# EAGLE board MusicVis (EAGLE 8.6.3)
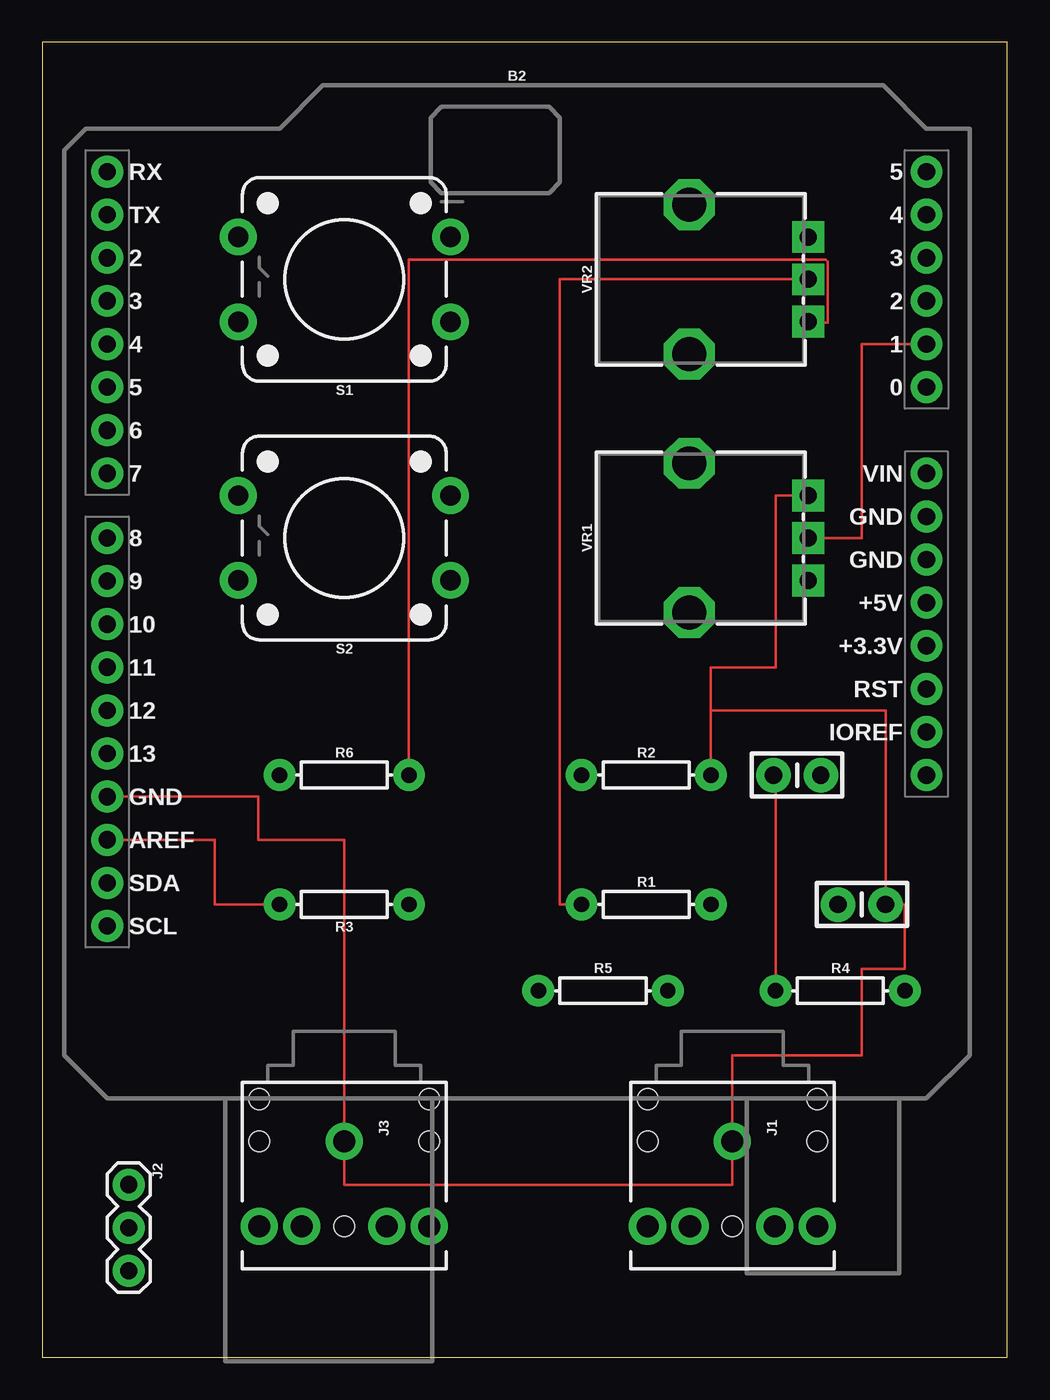
[diagram p0: board, top side]
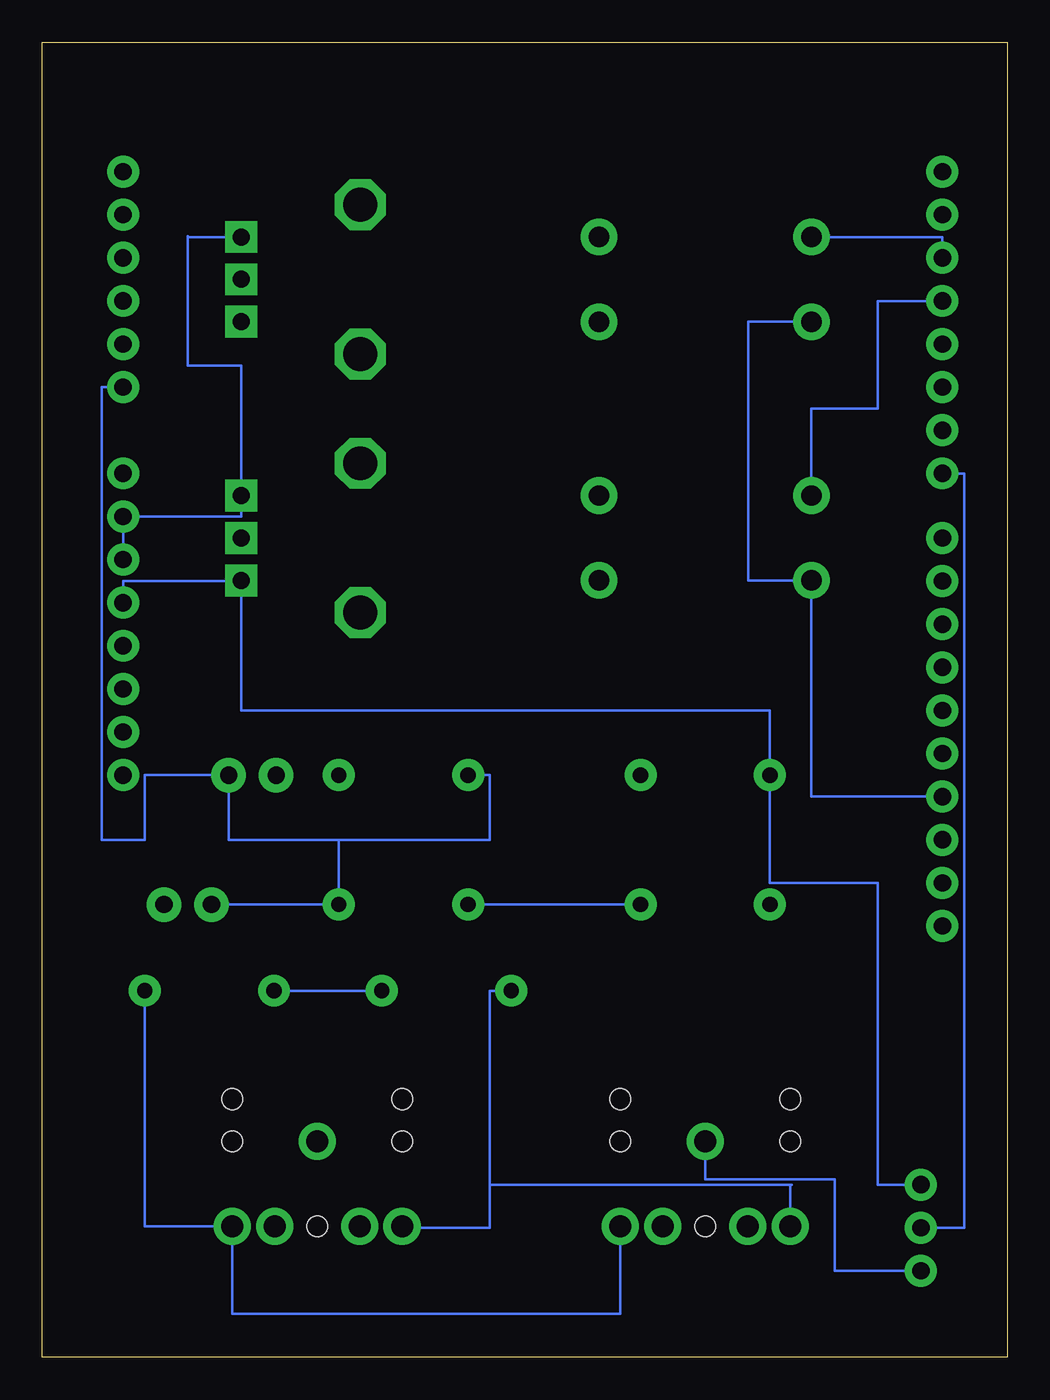
[diagram p1: board, bottom side, seen from below]

Size 56.82 x 77.46 mm. Coordinates in mm from the lower left corner, seen from the top.
Outline: 0,0 56.82,0 56.82,77.46 0,77.46 0,0
Copper layers (1*16): Top 0.035mm / dielectric 1.5mm / Bottom 0.035mm
Design rules "default": minimum track width 6mil, minimum drill 0.35mm, track to track 6mil, track to pad 6mil, pad to pad 6mil, via to via 6mil, smd to smd 6mil, copper to edge 40mil, drill to drill 6mil, minimum pad ring 10mil, minimum via ring 8mil, stop-mask expansion 4mil, vias tented up to drill 0mil, thermal gap 10mil

## Footprints (pad centres in the part's own frame; a part is rotated, then mirrored left to right if it is on the bottom)
UNO_R3_SHIELD = drill 1.016 pad 1.88: 3.3V 24.13,-2.54; 5V 24.13,0; A0 24.13,12.7; A1 24.13,15.24; A2 24.13,17.78; A3 24.13,20.32; A4 24.13,22.86; A5 24.13,25.4; AREF -24.13,-13.97; D2 -24.13,20.32; D3 -24.13,17.78; D4 -24.13,15.24; D5 -24.13,12.7; D6 -24.13,10.16; D7 -24.13,7.62; D8 -24.13,3.81; D9 -24.13,1.27; D10 -24.13,-1.27; D11 -24.13,-3.81; D12 -24.13,-6.35; D13 -24.13,-8.89; GND@0 24.13,2.54; GND@1 24.13,5.08; GND@2 -24.13,-11.43; IOREF 24.13,-7.62; NC 24.13,-10.16; RES 24.13,-5.08; RX -24.13,25.4; SCL -24.13,-19.05; SDA -24.13,-16.51; TX -24.13,22.86; VIN 24.13,7.62
CAP-PTH-SMALL-KIT = drill 1.016 pad 2.032: 1 -1.397,0; 2 1.397,0
AUDIO-JACK = drill 1.3 pad 2.184: RING 5,5; RSH 5,2.5; SLEEVE 0,0; TIP 5,-5; TSH 5,-2.5 | hole 1.2: 0,5; -2.5,5; -2.5,-5; 0,-5; 5,0
1X03 = drill 1.016 pad 1.88: 1 0,0; 2 2.54,0; 3 5.08,0
AXIAL-0.3 = drill 0.9 pad 1.88: P$1 -3.81,0; P$2 3.81,0
TACTILE_SWITCH_PTH_12MM = drill 1.2 pad 2.159: 1 6.25,-2.5; 2 -6.25,-2.5; 3 6.25,2.5; 4 -6.25,2.5
POT-PTH-ALPS = drill 1 pad 1.88 square: P$1 7,-2.5; P$2 7,0; P$3 7,2.5 | drill 2 octagon: P$4 0,-4.4; P$5 0,4.4

## Placement (x,y rotation side)
B2  ARDUINO_UNO_R3_SHIELDBASIC  [UNO_R3_SHIELD]  27.94,44.45 0 top
C1  0.1uF  [CAP-PTH-SMALL-KIT]  48.26,26.67 0 top
C2  0.1uF  [CAP-PTH-SMALL-KIT]  44.45,34.29 0 top
J1  AUDIO_JACK_3.5MM_PTH  [AUDIO-JACK]  40.64,12.7 270 top
J2  455-1750-1-ND  [1X03]  5.08,10.16 270 top
J3  AUDIO_JACK_3.5MM_PTH  [AUDIO-JACK]  17.78,12.7 270 top
R1  100k  [AXIAL-0.3]  35.56,26.67 0 top
R2  100k  [AXIAL-0.3]  35.56,34.29 0 top
R3  1k  [AXIAL-0.3]  17.78,26.67 180 top
R4  1k  [AXIAL-0.3]  46.99,21.59 0 top
R5  1k  [AXIAL-0.3]  33.02,21.59 0 top
R6  1k  [AXIAL-0.3]  17.78,34.29 0 top
S1  MOMENTARY-SWITCH-SPST-PTH-12MM  [TACTILE_SWITCH_PTH_12MM]  17.78,63.5 180 top
S2  MOMENTARY-SWITCH-SPST-PTH-12MM  [TACTILE_SWITCH_PTH_12MM]  17.78,48.26 180 top
VR1  10k  [POT-PTH-ALPS]  38.1,48.26 0 top
VR2  10k  [POT-PTH-ALPS]  38.1,63.5 0 top

## Library data of the parts
B2 = SparkFun-Boards
C1 C2 = SparkFun-Capacitors; PROD_ID: CAP-08370
J1 J3 = SparkFun-Connectors; PROD_ID: CONN-08774; SF_ID: PRT-08032
J2 = SparkFun-Connectors; PROD_ID: XXX-00000
R1 R2 = SparkFun-Resistors; PROD_ID: RES-12184
R3-R6 = SparkFun-Resistors; PROD_ID: RES-12182
S1 S2 = SparkFun-Switches; PROD_ID: SWCH-09185; SF_SKU: COM-09190
VR1 VR2 = SparkFun-Resistors; PROD_ID: RES-09177; SF_SKU: COM-09288

## Nets
5V: B2.5V J2.1 R6.P$1 VR1.P$1
GND: B2.GND@0 B2.GND@1 B2.GND@2 C1.2 J1.SLEEVE J2.3 J3.SLEEVE R2.P$2 S1.3 S2.3 VR1.P$3 VR2.P$3
N$1: B2.D2 S1.1
N$2: B2.D3 S2.1
N$3: B2.D7 J2.2
N$4: J1.TIP J3.TIP R5.P$1
N$5: J1.RING J3.RING R4.P$2
N$6: C2.1 R4.P$1 R5.P$2
N$7: R6.P$2 VR2.P$1
N$9: B2.A0 C1.1 C2.2 R1.P$2 R2.P$1
N$11: B2.AREF R3.P$2
N$12: R1.P$1 R3.P$1 VR2.P$2
N$14: B2.A1 VR1.P$2

## Tracks (layer width: path | path; a pad name or v marks a point on that pad's centre or on a via)
5V
  Bottom 0.152: B2.5V 52.07,45.72 45.1,45.72 VR1.P$1 45.1,38.1 13.97,38.1 R6.P$1 13.97,27.94 7.62,27.94 7.62,10.16 J2.1
GND
  Top 0.152: VR1.P$3 43.18,50.76 43.18,40.64 39.37,40.64 R2.P$2 39.37,38.1 49.66,38.1 C1.2 50.8,26.67 50.8,22.86 48.26,22.86 48.26,17.78 40.64,17.78 J1.SLEEVE 40.64,10.16 17.78,10.16 J3.SLEEVE 17.78,30.48 12.7,30.48 12.7,33.02 B2.GND@2
  Bottom 0.152: B2.GND@2 11.53,33.02 S2.3 15.24,45.76 15.24,61 S1.3 | B2.GND@0 B2.GND@1 45.1,49.53 VR1.P$3 45.1,58.42 48.26,58.42 48.26,66 | 48.26,66.04 48.26,66 | 48.26,66 VR2.P$3 | J2.3 10.16,5.08 10.16,10.46 17.78,10.46 J3.SLEEVE
N$1
  Bottom 0.152: S1.1 3.81,66 B2.D2
N$2
  Bottom 0.152: S2.1 11.53,55.88 7.62,55.88 7.62,62.23 B2.D3
N$3
  Bottom 0.152: J2.2 2.54,7.62 2.54,52.07 B2.D7
N$4
  Bottom 0.152: 12.78,10.16 12.7,10.16 | 12.78,10.16 30.48,10.16 | 30.48,10.16 30.48,7.62 35.64,7.62 J1.TIP | R5.P$1 30.48,21.59 30.48,10.16 | 12.78,10.16 J3.TIP
N$5
  Bottom 0.152: J3.RING 22.78,2.54 43.18,2.54 45.64,2.54 J1.RING 50.8,7.7 R4.P$2
N$6
  Top 0.152: C2.1 43.18,34.29 R4.P$1
  Bottom 0.152: R5.P$2 R4.P$1
N$7
  Top 0.152: VR2.P$1 45.1,60.96 46.27,60.96 46.27,64.53 46.13,64.67 21.59,64.67 R6.P$2
N$9
  Bottom 0.152: C1.1 R1.P$2 39.37,30.48 | 39.37,30.48 30.48,30.48 30.48,34.29 R2.P$1 | 39.37,30.48 45.85,30.48 C2.2 50.8,34.29 50.8,30.48 53.34,30.48 53.34,57.15 B2.A0
N$11
  Top 0.152: B2.AREF 10.16,30.48 10.16,26.67 R3.P$2
N$12
  Top 0.152: R1.P$1 30.48,26.67 30.48,63.5 VR2.P$2
  Bottom 0.152: R3.P$1 R1.P$1
N$14
  Top 0.152: VR1.P$2 48.26,48.26 48.26,59.69 B2.A1